# Altium PCB PCB2.PcbDoc (part 1 of 2)
Units mm, origin at the board's own origin, x right, y up, seen from the top; angles counter-clockwise.
Board outline 57.07 x 67 mm, 2 copper layers (Top Layer, Bottom Layer); 55 components, 52 nets, 263 pads, 110 vias.
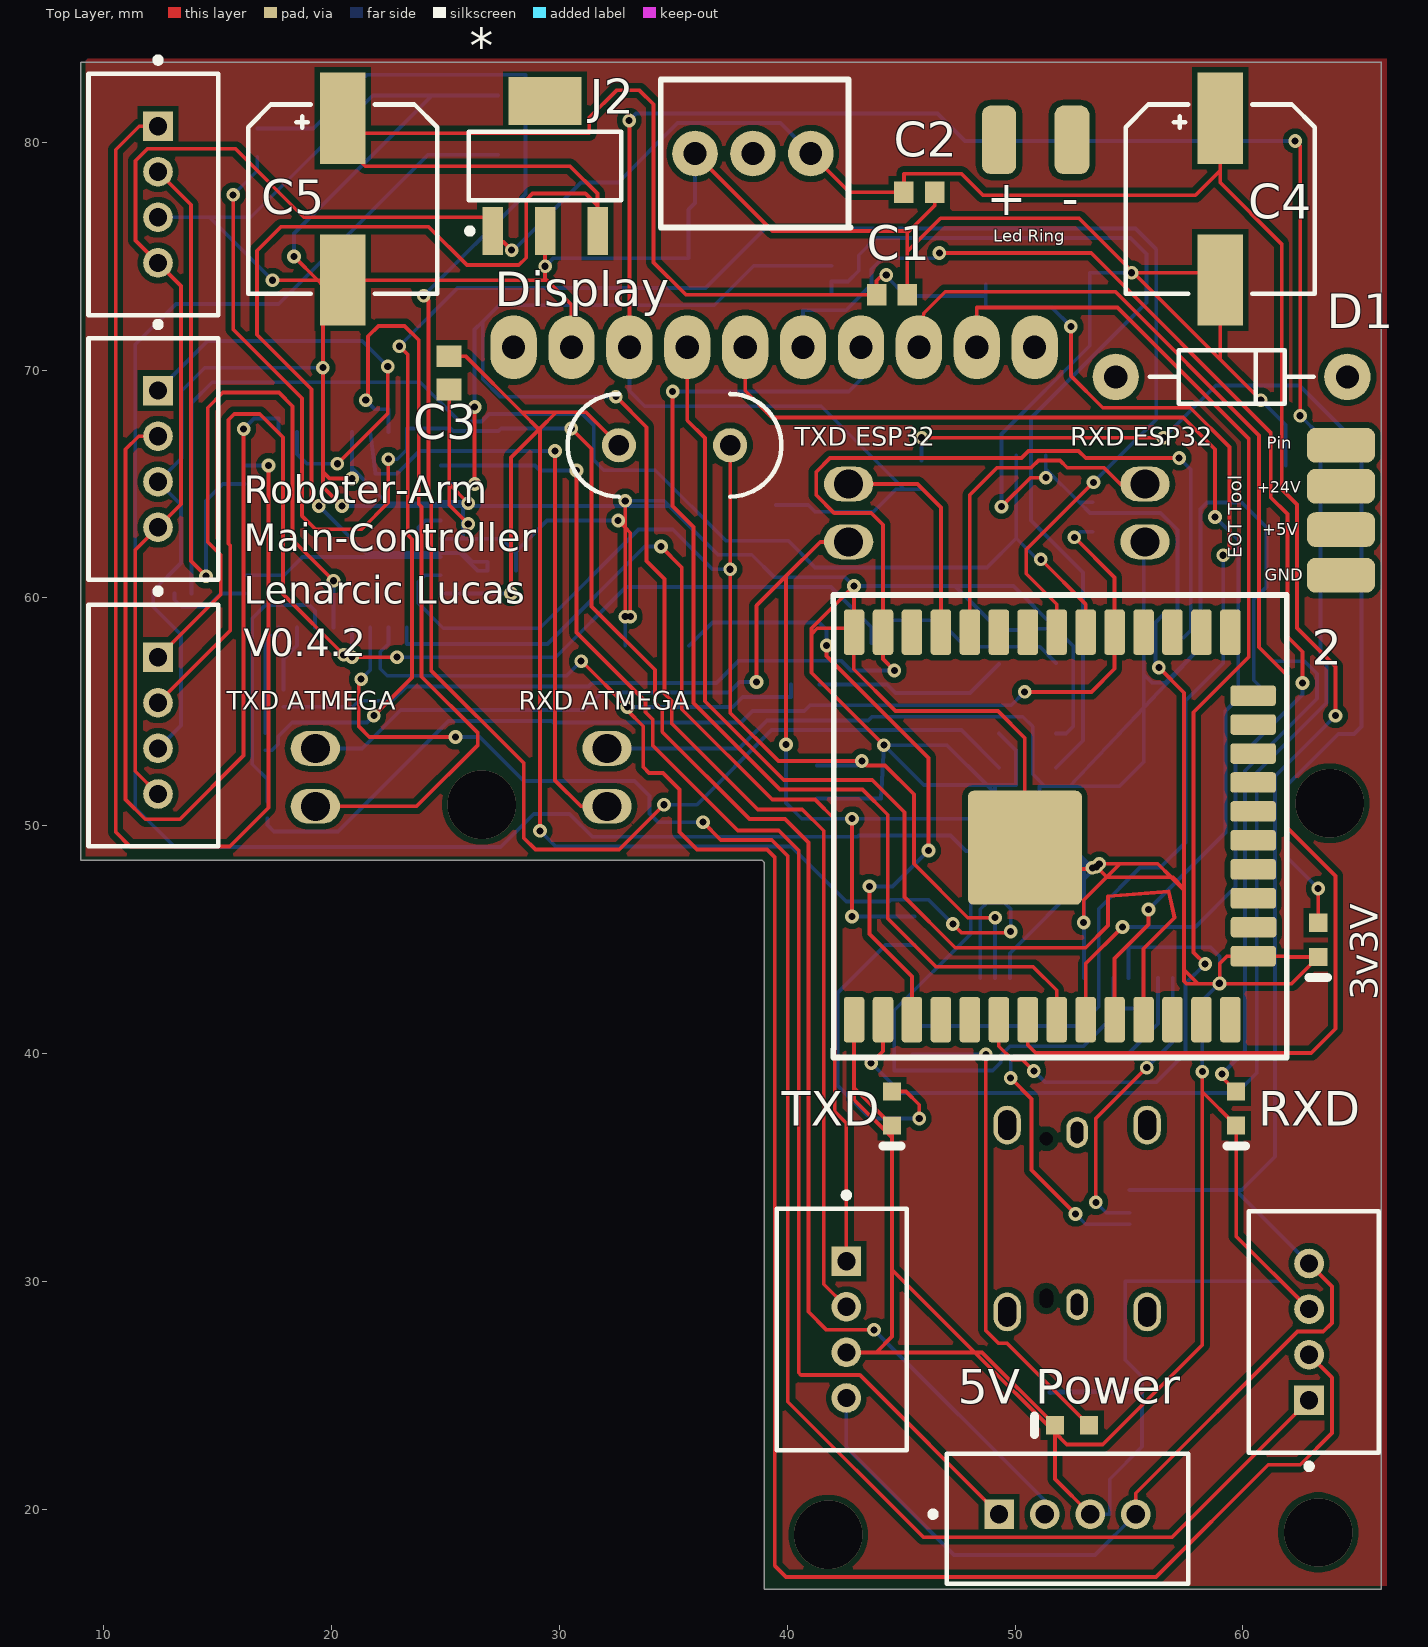
[diagram p0: Top Layer view]
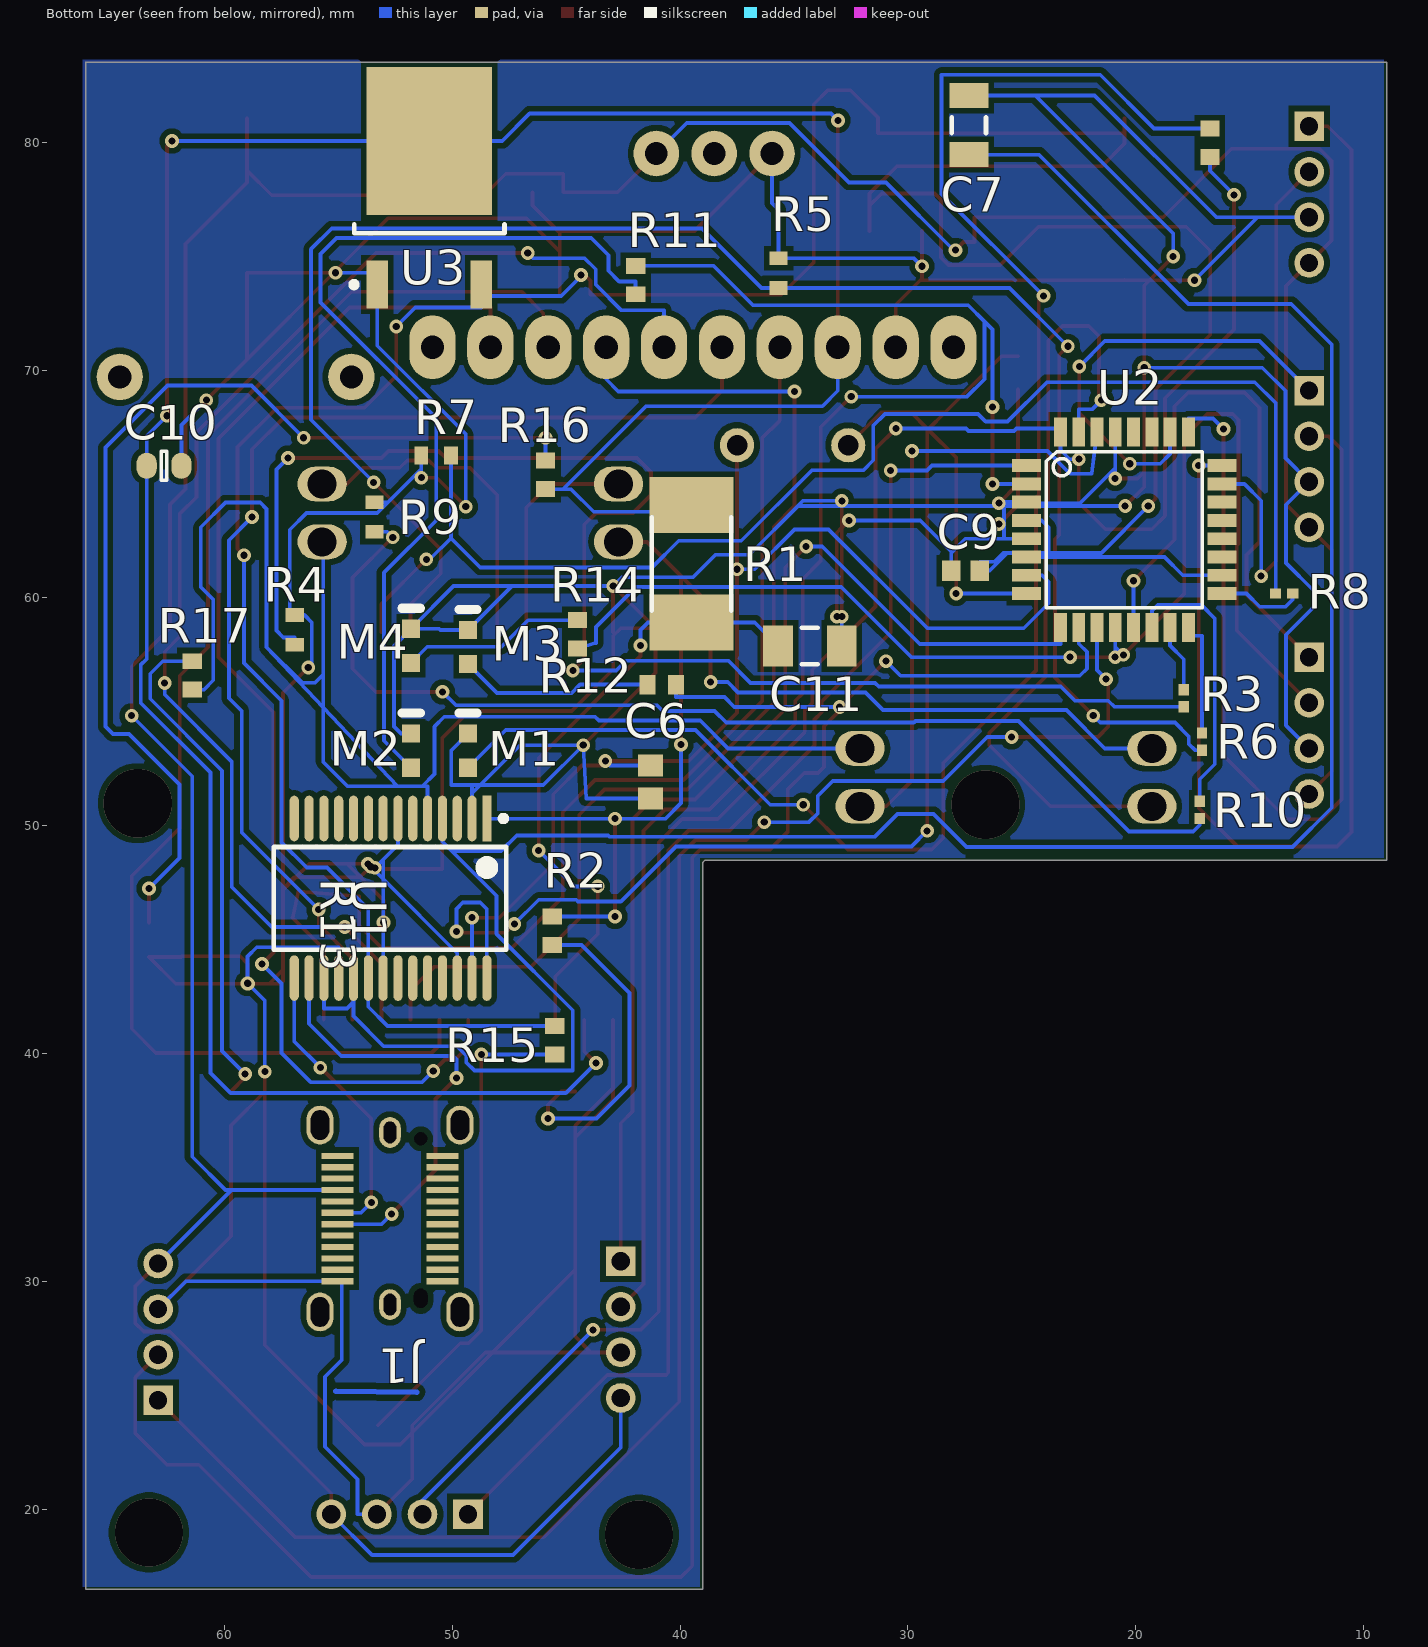
[diagram p1: Bottom Layer view, seen from below]

## Layer stack, top to bottom
Top Solder: solder mask 0.0102, Solder Resist, Dk 3.5
Top Layer: signal copper 0.0356
Dielectric 1: dielectric 0.32, FR-4, Dk 4.8
Bottom Layer: signal copper 0.0356
Bottom Solder: solder mask 0.0102, Solder Resist, Dk 3.5

## Board outline
9,48.5 38.9,48.5 39,48.4 39,16.5 66.075,16.5 66.075,83.5 9,83.5

## Design rules (kind name [scope] priority, off if disabled: settings)
AssemblyTestPointUsage AssemblyTestPointUsage_1 [All] p2:
AssemblyTestpoint AssemblyTestpoint_1 [All] p2: testpointundercomponent=TRUE minsize=1.016 maxsize=2.54 preferedsize=1.524 minholesize=0 maxholesize=1.016 preferedholesize=0.813 testpointgrid=0.025 usegrid=TRUE gridtolerance=0 allowsidetop=TRUE allowsidebottom=TRUE
Clearance [All] p1: gap=0.254 ignorepadtopadclearanceinfootprint=FALSE except(0: Arc-Hole Track-Hole SMDPad-Hole THPad-Hole Via-Hole Fill-Hole Poly-Hole Region-Hole Text-Hole)
Clearance Clearance_1 [All] p2: gap=0.254 ignorepadtopadclearanceinfootprint=FALSE except(0: Arc-Hole Track-Hole SMDPad-Hole THPad-Hole Via-Hole Fill-Hole Poly-Hole Region-Hole Text-Hole)
ComponentClearance ComponentClearance_1 [All] p2: gap=0.254 collisioncheckmode=3 verticalgap=0.254 showdistances=FALSE
DiffPairsRouting DiffPairsRouting_1 [All] p2: maxlimit=0.254 minlimit=0.254 mostfreqgap=0.254 toplayer_minwidth=0.381 toplayer_maxwidth=0.381 toplayer_prefwidth=0.381 bottomlayer_minwidth=0.381 bottomlayer_maxwidth=0.381 bottomlayer_prefwidth=0.381 maxuncoupledlength=12.7
FabricationTestPointUsage FabricationTestPointUsage_1 [All] p2: valid=0 allowmultiple=FALSE
FabricationTestpoint FabricationTestpoint_1 [All] p2: side=3 testpointundercomponent=TRUE minsize=1.016 maxsize=2.54 preferedsize=1.524 minholesize=0 maxholesize=1.016 preferedholesize=0.813 testpointgrid=0.025 allowsidetop=TRUE allowsidebottom=TRUE usegrid=TRUE gridtolerance=0
FanoutControl Fanout_LCC [IsLCC] p1: bgadir=Out bgaviamode=Centered fanoutstyle=Auto fanoutdirection=Alternating viagrid=0.025 // Fanout_LCC (Default Rule)
FanoutControl Fanout_BGA [IsBGA] p2: bgadir=Out bgaviamode=Centered fanoutstyle=Auto fanoutdirection=Alternating viagrid=0.025 // Fanout_BGA (Default Rule)
FanoutControl Fanout_Default [All] p4: bgadir=Out bgaviamode=Centered fanoutstyle=Auto fanoutdirection=Alternating viagrid=0.025 // Fanout_Default (Default Rule)
FanoutControl Fanout_Small [(CompPinCount < 5)] p5: bgadir=Out bgaviamode=Centered fanoutstyle=Auto fanoutdirection=OutThenIn viagrid=0.025 // Fanout_Small (Default Rule)
FanoutControl Fanout_BGA_1 [IsBGA] p6: bgadir=Out bgaviamode=Centered fanoutstyle=Auto fanoutdirection=Alternating viagrid=0.025 // Fanout_BGA (Default Rule)
FanoutControl Fanout_LCC_1 [IsLCC] p7: bgadir=Out bgaviamode=Centered fanoutstyle=Auto fanoutdirection=Alternating viagrid=0.025 // Fanout_LCC (Default Rule)
FanoutControl Fanout_SOIC_1 [IsSOIC] p8: bgadir=Out bgaviamode=Centered fanoutstyle=Auto fanoutdirection=Alternating viagrid=0.025 // Fanout_SOIC (Default Rule)
FanoutControl Fanout_Small_1 [(CompPinCount < 5)] p9: bgadir=Out bgaviamode=Centered fanoutstyle=Auto fanoutdirection=OutThenIn viagrid=0.025 // Fanout_Small (Default Rule)
FanoutControl Fanout_Default_1 [All] p10: bgadir=Out bgaviamode=Centered fanoutstyle=Auto fanoutdirection=Alternating viagrid=0.025 // Fanout_Default (Default Rule)
Height Height_1 [All] p2: minheight=0 maxheight=25.4 prefheight=12.7
HoleSize HoleSize_1 [All] p2: absolutevalues=TRUE maxlimit=2.54 minlimit=0.025 maxpercent=80.000 minpercent=20.000
HoleToHoleClearance HoleToHoleClearance_1 [All] p2: gap=0.254 allowstackedmicrovias=TRUE
LayerPairs LayerPairs_1 [All] p2: enforce=TRUE
MinimumSolderMaskSliver MinimumSolderMaskSliver_1 [All] p2: minsoldermaskwidth=0.254
NetAntennae NetAntennae_1 [All] p2: netantennaetolerance=0
PasteMaskExpansion PasteMaskExpansion_1 [All] p2: expansion=0
PlaneClearance PlaneClearance_1 [All] p2: clearance=0.508
PlaneConnect PlaneConnect_1 [All] p2: planeconnectstyle=Relief reliefexpansion=0.508 reliefentries=4 reliefconductorwidth=0.254 reliefairgap=0.254
PolygonConnect [All] p1: connectstyle=Relief reliefconductorwidth=0.254 reliefentries=4 polygonreliefangle="90 Angle" airgapwidth=0.254
PolygonConnect PolygonConnect_1 [All] p2: connectstyle=Relief reliefconductorwidth=0.254 reliefentries=4 polygonreliefangle="90 Angle" airgapwidth=0.254
RoutingCorners RoutingCorners_1 [All] p2: cornerstyle=45-Degree minsetback=2.54 maxsetback=2.54
RoutingLayers RoutingLayers_1 [All] p2: top layer_v5=TRUE bottom layer_v5=TRUE
RoutingPriority RoutingPriority_1 [All] p2: routingpriority=0
RoutingTopology [All] p1: topology=Daisy_Balanced
RoutingTopology RoutingTopology_1 [All] p2: topology=Shortest
RoutingVias [All] p1: holewidth=0.311 width=0.6 viastyle="Through Hole" minholewidth=0.311 minwidth=0.6 maxholewidth=0.711 maxwidth=1.27
RoutingVias RoutingVias_1 [All] p2: holewidth=0.711 width=1.27 viastyle="Through Hole" minholewidth=0.711 minwidth=1.27 maxholewidth=0.711 maxwidth=1.27
ShortCircuit ShortCircuit_1 [All] p2: allowed=FALSE
SilkToBoardRegionClearance SilkToBoardRegionClearance_1 [All] p2:
SilkToSilkClearance SilkToSilkClearance_1 [All] p2: silktosilkclearance=0.254
SilkToSolderMaskClearance SilkToSolderMaskClearance_1 [IsPad] p2: minsilkscreentomaskgap=0.254 clearancetoexposedcopper=TRUE
SolderMaskExpansion [All] p1: expansion=0.102 istentingtop=FALSE
SolderMaskExpansion SolderMaskExpansion_1 [All] p2: expansion=0.102 istentingtop=FALSE
UnRoutedNet UnRoutedNet_1 [All] p2:
UnpouredPolygon UnpouredPolygon_1 [All] p2:
Width [All] p1: maxlimit=0.254 minlimit=0.144 preferedwidth=0.164 minimp=50.000000 maximp=50.000000 favimp=50.000000
Width Width_1 [All] p2: maxlimit=0.254 minlimit=0.154 preferedwidth=0.204 minimp=50.000000 maximp=50.000000 favimp=50.000000
25 further rules are at their usual default settings.

## Classes and differential pairs
component class Sheet2: * USB-C
component class MainSchematic: 3v3V "3v3V Power" * D6 D7 D8 J1 J2 "RXD ESP32" "TXD ESP32" U1 U2 U3 U4 X1

## Components (designator, comment, footprint, x,y, rotation, side; value= is the part's Value field where it differs from the comment)
2 "Espressif Systems ESP32-WROOM-32U" PCB-s9cahnfxwmssy5lrdql1-1 51.7,50 r90 top (schematic designator U4)
3v3V "HSMD-C190" AVAG-HSMX-C190_V 63.3,45 r270 top (schematic designator "3v3V Power")
"5V Power" "HSMD-C190" AVAG-HSMX-C190_V 52.5,23.7 r180 top
* "Texas Instruments LM7805MPX/NOPB" PCB-4j8pz0fvsyjao2wd9t55-1 29.382,78.95 r90 top
C1 "0,1uF" PCB-ygfjbn9s2h0hdffghsun-1 44.6,73.3 r0 top
C2 "0,1uF" PCB-ygfjbn9s2h0hdffghsun-1 45.8,77.8 r180 top
C3 "30pF" CAPC1608X92X38ML15T08 25.175,69.875 r90 top
C4 "1000uF" PCB-6nlarhmhqnsp8hp5opt1-1 59,77.5 r0 top
C5 "1000uF" PCB-6nlarhmhqnsp8hp5opt1-1 20.5,77.5 r0 top
C6 "30pF" CAPC1608X92X38ML15T08 41.3,51.925 r90 bottom
C7 "100nF" CAPC3216X09L 27.325,80.75 r90 bottom
C9 "100 nf" CAPC1608X87X35LL15T15 27.475,61.2 r180 bottom
C10 "CAP 10uF 0603" CC0603_OV 62.638,65.8 r0 bottom value=10uF
C11 "1nF" CAPC3216X88X50NL20T25 34.3,57.9 r180 bottom
D1 "1N4007" PCBCOMPONENT_1 59.5,69.7 r180 top
Display "Molex 90142-0010" "Molex 90142-0006-Footprint-2" 28,68.206 r0 top (schematic designator *)
J1 "JAE Electronics DX07S024WJ1R350" PCB-c92dq56pmj9hhsl6x7py-1 52.725,32.775 r270 bottom
J2 "INPUT_Power" PCB-6ccby9ci1emhqvhnf7pu-1 38.5,79.5 r0 top
J? "35362-0450" FP-35362-0450-MFG 12.2,77.7 r90 top
J? "35362-0450" FP-35362-0450-MFG 63.1,27.8 r270 top
M1 "HSMD-C190" AVAG-HSMX-C190_V 49.3,53.3 r90 bottom
M2 "HSMD-C190" AVAG-HSMX-C190_V 51.8,53.3 r90 bottom
M3 "HSMD-C190" AVAG-HSMX-C190_V 49.3,57.85 r90 bottom
M4 "HSMD-C190" AVAG-HSMX-C190_V 51.8,57.9 r90 bottom
R1 "12k" RESC6432X07N 39.5,61.5 r90 bottom
R2 "220Ohm" RESC1608X55X30LL15T15 45.6,45.4 r90 bottom
R3 "2,2k" RESC1005X37X25LL05T10 17.9,55.6 r270 bottom
R4 "3,3k" RESC1608X55X25LL10T15 56.9,58.6 r90 bottom
R5 "3,3k" RESC1608X55X25LL10T15 35.675,74.25 r270 bottom
R6 "2,2k" RESC1005X37X25LL05T10 17.1,53.7 r270 bottom
R7 "3,3k" RESC1608X55X25LL10T15 50.7,66.25 r180 bottom
R8 "2,2k" RESC1005X37X25LL05T10 13.5,60.2 r0 bottom
R9 "3,3k" RESC1608X55X25LL10T15 53.4,63.55 r270 bottom
R10 "2,2k" RESC1005X37X25LL05T10 17.2,50.7 r270 bottom
R11 "220Ohm" RESC1608X55X30LL15T15 41.95,73.95 r90 bottom
R12 "220Ohm" RESC1608X55X30LL15T15 40.8,56.2 r180 bottom
R13 "220Ohm" RESC1608X55X30LL15T15 16.75,79.975 r270 bottom
R14 "220Ohm" RESC1608X55X30LL15T15 44.5,58.4 r270 bottom
R15 "220Ohm" RESC1608X55X30LL15T15 45.5,40.6 r90 bottom
R16 "220Ohm" RESC1608X55X30LL15T15 45.9,65.4 r270 bottom
R17 "220Ohm" RESC1608X55X30LL15T15 61.4,56.6 r270 bottom
RXD "HSMD-C190" AVAG-HSMX-C190_V 59.7,37.6 r270 top
"RXD ATMEGA" "RXD ATMEGA" "Amphenol ICC _ FCI 68786-102LF-Footprint-1" 32.1,50.86 r0 top
"RXD ESP32" "RXD ESP32" "Amphenol ICC _ FCI 68786-102LF-Footprint-1" 55.7,62.46 r0 top
TXD "HSMD-C190" AVAG-HSMX-C190_V 44.6,37.6 r270 top
"TXD ATMEGA" "TXD ATMEGA" "Amphenol ICC _ FCI 68786-102LF-Footprint-1" 19.3,50.86 r0 top
"TXD ESP32" "TXD ESP32" "Amphenol ICC _ FCI 68786-102LF-Footprint-1" 42.7,62.46 r0 top
U1 "FTDI FT232RL" PCB-uwrbgvod66r8ixue8rhm-1 52.7,46.8 r270 bottom
U2 "Microchip ATMEGA328P-AU" PCB-pmhtxxix7sripjdh33vl-1 17.688,58.701 r180 bottom
U3 "LD1117DT33TR" TO-252_N 51,78 r90 bottom
X1 "16.000MHZ" PCB-m5wiadh0ra6h79h7klez-1 37.5,66.7 r180 top
? "35362-0450" FP-35362-0450-MFG 12.2,66.1 r90 top
? "35362-0450" FP-35362-0450-MFG 42.4,27.9 r90 top
? "35362-0450" FP-35362-0450-MFG 52.3,19.6 r180 top
? "35362-0450" FP-35362-0450-MFG 12.2,54.4 r90 top

## Footprints (in the part's own frame and the unit in brackets; to place one, negate y for a bottom-side part, rotate by r counter-clockwise, add the part's x,y. Pads: shape width x height; smd on the part's side, far side on the other; paste and mask are expansions set on the pad)
"Amphenol ICC _ FCI 68786-102LF-Footprint-1" [mil]
  oval 85x60 hole 50: 1(0,0) 2(0,100)
  body extent -50,-50 50,150, height 200
AVAG-HSMX-C190_V [mm] "SMD, 2-Leads, Body 1.6x0.8mm, Height 0.9mm"
  rect 0.8x0.8 smd: 1(-0.75,0) 2(0.75,0)
  silkscreen extent 1.65,-0.4 1.65,0.4, body extent -0.8,-0.4 0.8,0.4, height 0.9
CAPC1608X87X35LL15T15 [mm] "CAPC1608X87X35LL15T15"
  rect 0.8x0.9 smd: 1(-0.625,0) 2(0.625,0)
  body extent -0.87,-0.48 0.87,0.48, height 0.87
CAPC1608X92X38ML15T08 [mm] "CAPC1608X92X38ML15T08"
  rect 0.95x1.1 smd: 1(-0.725,0) 2(0.725,0)
  body extent -0.87,-0.48 0.87,0.47, height 0.92
CAPC3216X09L [mm] "Chip Capacitor, 2-Leads, Body 3,20x1,60mm, IPC High Density"
  rect 1.1x1.7 smd: 1(-1.3,0) 2(1.3,0)
  silkscreen extent -0.35,-0.75 0.35,0.75, body extent -1.7,-0.9 1.7,0.9, height 0.95
CAPC3216X88X50NL20T25 [mm] "CAPC3216X88X50NL20T25"
  rect 1.3x1.8 smd: 1(-1.4,0) 2(1.4,0)
  silkscreen extent -0.35,-0.8 0.35,0.8, body extent -1.7,-0.9 1.7,0.9, height 0.88
CC0603_OV [mil] "CC0603_OV"
  oval 35x45 smd: 1(-30,0) 2(30,0)
  silkscreen extent -5,-25 5,25, body extent -31,-16 31,16, height 35
FP-35362-0450-MFG [mm]
  rect 1.3x1.3 hole 0.8 paste-1000 mask+0: 1(3,-0.2)
  round 1.3 hole 0.8 paste-1000 mask+0: 2(1,-0.2) 3(-1,-0.2) 4(-3,-0.2)
  silkscreen extent -5.3,-2.85 6.02,2.85, body extent -5.4,-2.95 5.4,2.95, height 0.25
"Molex 90142-0006-Footprint-2" [mil]
  oval 80x110 hole 40: 0(0,110) 1(100,110) 2(200,110) 3(300,110) 4(400,110) 5(500,110) 6(600,110) 7(700,110) 8(800,110) 9(900,110)
PCB-4j8pz0fvsyjao2wd9t55-1 [mm] "STM-SOT223_L"
  rect 2.1x0.9 smd: 1(-2.85,2.3) 2(-2.85,0) 3(-2.85,-2.3)
  rect 2.1x3.2 smd: 4(2.85,0)
  silkscreen extent -2.97,-3.35 1.5,3.42, body extent -1.85,-3.35 1.85,3.35, height 1.8
PCB-6ccby9ci1emhqvhnf7pu-1 [mm]
  round 2 hole 1: 1(-2.54,0) 2(0,0) 3(2.54,0)
  silkscreen extent -4.04,-3.25 4.29,3.25, body extent -4.04,-3.17 4.04,3.32, height 10
PCB-6nlarhmhqnsp8hp5opt1-1 [mm] "SMD, 2-Leads, Body 8.3x8.3mm, Height 10.5mm"
  rect 2x4 smd: 1(0,3.55) 2(0,-3.55)
  silkscreen extent -4.15,-4.15 4.15,4.15, body extent -4.15,-4.97 4.15,4.95, height 10.5
PCB-c92dq56pmj9hhsl6x7py-1 [mm]
  oval 1.7x1.2 hole 0.8 slot 1.3 at 0 deg: 0(-4.1,-3.07) 0(-4.1,3.07) 0(4.1,-3.07) 0(4.1,3.07)
  oval 1.35x0.95 hole 0.55 slot 0.95 at 0 deg: 0(-3.775,0) 0(3.775,0)
  rect 0.27x1.4 smd: A1(-2.75,2.3) A2(-2.25,2.3) A3(-1.75,2.3) A4(-1.25,2.3) A5(-0.75,2.3) A6(-0.25,2.3) A7(0.25,2.3) A8(0.75,2.3) A9(1.25,2.3) A10(1.75,2.3) A11(2.25,2.3) A12(2.75,2.3) B1(2.75,-2.3) B2(2.25,-2.3) B3(1.75,-2.3) B4(1.25,-2.3) B5(0.75,-2.3) B6(0.25,-2.3) B7(-0.25,-2.3) B8(-0.75,-2.3) B9(-1.25,-2.3) B10(-1.75,-2.3) B11(-2.25,-2.3) B12(-2.75,-2.3)
  round 0 hole 0.6 unplated: ""(-3.5,1.35)
  round 0 hole 0.6 slot 0.85 at 0 deg unplated: ""(3.5,1.35)
PCB-m5wiadh0ra6h79h7klez-1 [mm]
  round 1.5 hole 0.9: 1(0,0) 2(4.88,0)
  silkscreen extent -2.25,-2.25 7.13,2.25
PCB-pmhtxxix7sripjdh33vl-1 [mil] "TQFP32-08"
  rect 50x22 smd: 1(-280,280) 2(-280,248) 3(-280,217) 4(-280,185) 5(-280,153.25) 6(-280,121.76) 7(-280,90.26) 8(-280,58.76) 17(58,58.76) 18(58,90.26) 19(58,121.76) 20(58,153.25) 21(58,185) 22(58,217) 23(58,248) 24(58,280)
  rect 22x50 smd: 9(-221.24,0) 10(-189.74,0) 11(-158.24,0) 12(-126.75,0) 13(-95,0) 14(-63,0) 15(-32,0) 16(0,0) 25(0,338) 26(-32,338) 27(-63,338) 28(-95,338) 29(-126.75,338) 30(-158.24,338) 31(-189.74,338) 32(-221.24,338)
  silkscreen extent -246,34 24,304, body extent -288,-8 66,346, height 40
PCB-s9cahnfxwmssy5lrdql1-1 [mm]
  rrect30% 2x0.9 smd: 1(-8.5,8.763) 2(-8.5,7.493) 3(-8.5,6.223) 4(-8.5,4.953) 5(-8.5,3.683) 6(-8.5,2.413) 7(-8.5,1.143) 8(-8.5,-0.127) 9(-8.5,-1.397) 10(-8.5,-2.667) 11(-8.5,-3.937) 12(-8.5,-5.207) 13(-8.5,-6.477) 14(-8.5,-7.747) 25(8.5,-7.747) 26(8.5,-6.477) 27(8.5,-5.207) 28(8.5,-3.937) 29(8.5,-2.667) 30(8.5,-1.397) 31(8.5,-0.127) 32(8.5,1.143) 33(8.5,2.413) 34(8.5,3.683) 35(8.5,4.953) 36(8.5,6.223) 37(8.5,7.493) 38(8.5,8.763)
  rrect30% 0.9x2 smd: 15(-5.715,-8.747) 16(-4.445,-8.763) 17(-3.175,-8.747) 18(-1.905,-8.747) 19(-0.635,-8.747) 20(0.635,-8.747) 21(1.905,-8.747) 22(3.175,-8.747) 23(4.445,-8.747) 24(5.715,-8.747)
  rrect10% 5x5 smd: 39(-0.957,1.27)
  silkscreen extent -10.16,-10.22 10.13,9.68, body extent -9.02,-9.27 9.05,16.27, height 3.04
PCB-uwrbgvod66r8ixue8rhm-1 [mm] "SOP, 28-Leads, Body 10.2x5.3mm, Pitch 0.65mm, IPC High Density"
  rect 2x0.4 smd: 1(-3.525,4.225)
  oval 2x0.4 smd: 2(-3.525,3.575) 3(-3.525,2.925) 4(-3.525,2.275) 5(-3.525,1.625) 6(-3.525,0.975) 7(-3.525,0.325) 8(-3.525,-0.325) 9(-3.525,-0.975) 10(-3.525,-1.625) 11(-3.525,-2.275) 12(-3.525,-2.925) 13(-3.525,-3.575) 14(-3.525,-4.225) 16(3.475,-3.575) 17(3.475,-2.925) 18(3.475,-2.275) 19(3.475,-1.625) 20(3.475,-0.975) 21(3.475,-0.325) 22(3.475,-4.225) 22(3.475,0.325) 23(3.475,0.975) 24(3.475,1.625) 25(3.475,2.275) 26(3.475,2.925) 27(3.475,3.575) 28(3.475,4.225)
  silkscreen extent -3.65,-5.13 2.22,5.07, body extent -2.68,-5.13 2.62,5.07, height 2.01
PCB-ygfjbn9s2h0hdffghsun-1 [mm] "CAPC1608X90X35NL10T15"
  rect 0.85x0.95 smd: 1(-0.675,0) 2(0.675,0)
  body extent -0.85,-0.45 0.85,0.45, height 0.9
PCBCOMPONENT_1 [mil] "AXIAL, 2-Leads, Diameter 2.35mm"
  round 80 hole 40: 1(200,0) 2(-200,0)
  silkscreen extent -142,-46 142,46, body extent -217,-52 217,55, height 114
RESC1005X37X25LL05T10 [mm] "RESC1005X37X25LL05T10"
  rect 0.5x0.45 smd: 1(-0.375,0) 2(0.375,0)
  body extent -0.53,-0.27 0.53,0.28, height 0.37
RESC1608X55X25LL10T15 [mm] "RESC1608X55X25LL10T15"
  rect 0.6x0.8 smd: 1(-0.65,0) 2(0.65,0)
  body extent -0.85,-0.45 0.85,0.45, height 0.55
RESC1608X55X30LL15T15 [mm] "RESC1608X55X30LL15T15"
  rect 0.7x0.85 smd: 1(-0.625,0) 2(0.625,0)
  body extent -0.87,-0.48 0.87,0.48, height 0.55
RESC6432X07N [mm] "Chip Resistor, 2-Leads, Body 6.35x3.20mm, IPC Medium Density"
  rect 2.45x3.7 smd: 1(-2.575,0) 2(2.575,0)
  silkscreen extent -2.05,-1.75 2.05,1.75, body extent -3.23,-1.68 3.22,1.67, height 0.65
TO-252_N [mm] "D-PAK, 4-Leads, Body 6.1x6.5mm, Pitch 2.28mm, Lead Span 9.7mm, IPC Medium Density"
  rect 2.1x0.95 smd: 1(-4.25,2.28) 3(-4.25,-2.28)
  rect 6.5x5.5 smd: 4(2.05,0)
  silkscreen extent -4.37,-3.3 -1.6,3.43, body extent -2,-3.3 4.2,3.3, height 2.4

## Part data
2: library part CMP-ba1676706f1765d1-28, "WiFi Modules (802.11) SMD Module, ESP32-D0WDQ6, 32Mbits SPI flash, UART Mode"
3v3V "5V Power" RXD TXD ? ? ? ?: library part CMP-90265921f4414fe1-1, "598 Series Blue 2 x 1.25 x 0.7 mm 140° Water Clear 140 mcd 3.2 V SMT LED", Case/Package=0805, Case/Package (SI)=2012, Color=Blue, Forward Voltage="3.20 V", Manufacturer Part Number=598-8191-107F, Lead-Free Status="Lead Free", Lens Type=Non-Diffused, Luminous Intensity="140 mcd", Mounting Style="Surface Mount", Number of Pins=2, Octopart URL=http://octopart.com/598-8191-107f-dialight-868609, OctopartID=90265921f4414fe1, Packaging=Reel, RoHS=Compliant, Size-Height="700 µm", Size-Length="2.00 mm", Size-Width="1.25 mm", Viewing Angle="140 °", Wavelength="475 nm, 473 nm"
*: library part CMP-00afcdd7e6a1df68-3, "1.5-A, Wide VIN Fixed Voltage Regulators 4-SOT-223 0 to 0", Case/Package=SOT-223, Dropout Voltage="2.00 V", Manufacturer Part Number=LM7805MPX/NOPB, Operating Temperature="0.00 °C to 125 °C", Output Capacitor Type=Ceramic, Quiescent Current="6.00 mA", Lead-Free Status="Contains Lead", Lifecycle Status=Active, Number of Pins=4, Number of Regulated Outputs=1, Octopart URL=https://octopart.com/lm7805mpx%2Fnopb-texas+instruments-74629992, OctopartID=00afcdd7e6a1df68, RoHS=Compliant
C1 C2: library part CMP-230febb915d7fcc8-1, "0603 0.1 uF 35 V ±10 % Tolerance X7R Surface Mount Multilayer Ceramic Capacitor", Capacitance="100 nF", Capacitance Tolerance=±10%, Case/Package=0603, Manufacturer Part Number=GMK107B7104KAHT, Voltage Rating (DC)="35.0 V", Halogen Free Status="Halogen Free", Lead-Free Status="Lead Free", Lifecycle Status=Active, Mounting Style="Surface Mount", Octopart URL=https://octopart.com/gmk107b7104kaht-taiyo+yuden-29103038, OctopartID=230febb915d7fcc8, Packaging="Cut Tape (CT)", RoHS=Compliant
C3 C6: library part CMP-3554665-2, "Multilayer Ceramic Capacitors MLCC - SMD/SMT 0603 30pF 250V C0G 5% HI FREQ", Capacitance="3e-11 F", Capacitance Tolerance=±5%, Dielectric Characteristic=C0G/NP0, Manufacturer Part Number=VJ0603D300JXPAJ, Voltage Rating (DC)="250.0 V", Lead-Free Status="Lead Free", Octopart URL=https://octopart.com/vj0603d300jxpaj-vishay-45210262, OctopartID=a54f6ef45abf7a88, Packaging="Cut Tape (CT)", RoHS=Compliant
C4 C5: library part CMP-ee612768d29831a6-2, "1000uF 6.3 V Aluminium Electrolytic Capacitor; WT Series 1000h 8 (Dia.) x 10mm", Capacitance="1.00 mF", Capacitance Tolerance=±20%, Dielectric Material="Aluminum Electrolytic", Manufacturer Part Number=UWT0J102MNL1GS, Operating Temperature="105 °C (max)", Voltage Rating (DC)="6.30 V", Lead-Free Status="Lead Free", Mounting Style="Surface Mount", Number of Pins=2, Octopart URL=https://octopart.com/uwt0j102mnl1gs-nichicon-203167, OctopartID=ee612768d29831a6, Packaging="Cut Tape (CT), Tape & Reel (TR)", RoHS=Compliant, Size-Diameter="8.00 mm", Size-Height="10.0 mm", Size-Length="10.0 mm"
C7: library part CMP-7716bc466958a8d1-1, "1206 100000 pF 50V ±10% Tolerance X7R Surface Mount Multilayer Ceramic Capacitor", Capacitance="100 nF", Capacitance Tolerance=±10%, Case/Package=1206, Case/Package (SI)=3216, Dielectric Characteristic=X7R, Insulation Resistance="100 GΩ", Manufacturer Part Number=CC1206KRX7R9BB104, Voltage Rating (DC)="50.0 V", Halogen Free Status="Halogen Free", Lead-Free Status="Lead Free", Mounting Style="Surface Mount", Number of Pins=2, Octopart URL=http://octopart.com/cc1206krx7r9bb104-yageo-39467816, OctopartID=7716bc466958a8d1, Packaging="Cut Tape (CT), Tape & Reel (TR)", REACH SVHC Compliance="No SVHC", RoHS=Compliant, Size-Height="1.14 mm", Size-Length="3.20 mm", Size-Width="1.60 mm"
C9: library part CMP-1af8d38ac64bc53f-10, "Ceramic capacitor SMD-0603 100nF /50V X7R# K +-10%, Samsung, RoHS", Capacitance="100 nF", Capacitance Tolerance=±10%, Case/Package=0603, Dielectric Characteristic=X7R, Manufacturer Part Number=CL10B104KB8NNNC, Voltage Rating (DC)="50.0 V", Lead-Free Status="Lead Free", Mounting Style="Surface Mount", Octopart URL=https://octopart.com/cl10b104kb8nnnc-samsung-7928277, OctopartID=1af8d38ac64bc53f, RoHS=Compliant
C10: library part CMP-121611-5, "C Series 0603 10 uF 25 V ±10 % Tolerance X5R Multilayer Ceramic Capacitor", Manufacturer=Murata, Package=0603, Part Number=GRM188R61E106KA73J, Tolerance=10%, Voltage/Wattage=25V, Ex Price=0.36, Ex Supplier=https://www.mouser.vn/ProductDetail/Murata-Electronics/GRM188R61E106KA73J?qs=sGAEpiMZZMukHu%252BjC5l7YUSokBdqpA2iyRK88YQudCM%3D, OctopartID=a02668a768b37fe1, VN Price=850, VN Supplier=https://www.thegioiic.com/products/tu-gom-0603-10uf-25v
C11: library part CMP-8261919-2, "Multilayer Ceramic Capacitors MLCC - SMD/SMT 50volts 1000pF 10% X7R", Capacitance="1e-09 F", Capacitance Tolerance=±10%, Case/Package=1206, Case/Package (SI)=3216, Dielectric Characteristic=X7R, Dielectric Material=Ceramic, Manufacturer Part Number=C1206C102K5RAC, Voltage Rating (DC)="50.0 V", Lead-Free Status=R, Mounting Style="Surface Mount", Number of Pins=2, Octopart URL=https://octopart.com/c1206c102k5rac-kemet-967170, OctopartID=80a249a667c65f65, RoHS=Compliant
D1: library part CMP-9114309-20, "1N4007 Series 1000 V 1 A Axial Lead Standard Recovery Rectifier - CASE 59-10", Breakdown Voltage="1.00 kV (max)", Case/Package=DO-204, Current Rating="1.00 A", Forward Voltage="1.10 V", Manufacturer Part Number=1N4007G, Operating Temperature="-65.0 °C to 175 °C", Output Current="1.00 A (max)", Voltage Rating (DC)="1.00 kV", Halogen Free Status="Halogen Free", Lead-Free Status="Lead Free", Lifecycle Status=Active, Mounting Style=Axial, Number of Pins=2, Octopart URL=https://octopart.com/1n4007g-on+semiconductor-6031, OctopartID=ffb836b2cd51207f, Packaging=Bulk, Polarity=Standard, REACH SVHC Compliance="No SVHC", RoHS=Compliant
Display: library part CMP-a2626b6ccecb7da5-2, "2.54mm Pitch C-Grid III Crimp Housing Dual Row, 8 Circuits, Black", Color=Black, Contact Resistance="20.0 mΩ", Current Rating="3.00 A", Flammability Rating="UL 94 V-0", Insulation Resistance="5.00 GΩ", Manufacturer Part Number=90142-0008, Operating Temperature="105 °C (max)", Voltage Rating (AC)="350 V", Gender=Female, Glow Wire Compliant=Non-Compliant, Halogen Free Status="Not Reviewed", Housing Color=Black, Lead-Free Status="Lead Free", Lifecycle Status=Active, Mounting Style=PCB, Number of Contacts=8, Number of Positions=8, Number of Rows=2, Octopart URL=https://octopart.com/90142-0008-molex-281039, OctopartID=a2626b6ccecb7da5, Packaging=Bag, Pin Pitch="2.54 mm", REACH SVHC Compliance="No SVHC", RoHS=Compliant, Size-Height="7.72 mm", Size-Length="10.3 mm", Size-Width="15.2 mm"
J1: library part CMP-100bdd7e1ee2cfcc-1, "Vertical Mount Type C receptacle; 12mm Height", Case/Package="USB TYPE-C Vertical Mount", Manufacturer="JAE Electronics", Manufacturer Part Number=DX07S024WJ1R350, Supplier Part Number=670-2949-2-ND, Octopart URL=https://octopart.com/dx07s024wj1r350-jae+electronics-75443087, OctopartID=100bdd7e1ee2cfcc, Supplier=Digi-Key
J2: library part CMP-751491-6, "Conn Terminal Block 3 POS 2.54mm Solder ST Thru-Hole 10A/Contact", Color=Green, Flammability Rating="UL 94 V-0", Manufacturer Part Number=282834-3, Operating Temperature="-40.0 °C to 110 °C", Contact Material=Brass, Contact Plating=Tin, ELV Compliant=Compliant, Housing Color=Green, Housing Material="Nylon 6/6", Lead-Free Status="Lead Free", Lifecycle Status=Active, Mounting Style="Through Hole, Screw", Number of Contacts=3, Number of Positions=3, Number of Rows=1, Octopart URL=https://octopart.com/282834-3-te+connectivity-39539741, OctopartID=2bf4e0a55a8ff433, Orientation="Right Angle", Packaging=Bulk, Pin Pitch="2.54 mm", REACH SVHC Compliance="No SVHC", RoHS=Compliant, Size-Height="10.0 mm", Size-Length="8.08 mm", Size-Width="6.50 mm", Wire Gauge="16.0 AWG to 30.0 AWG"
J? J?: library part CMP-04776-000310-1, "CONN HEADER VERT 4POS 2MM", Color=White, Flammability Rating="UL94 V-0", Housing Color=Natural, Max Operating Temperature=105°C, Min Operating Temperature=-40°C, Voltage Rating=125V, Connector Type=Header, Contact Finish - Mating=TIN, Contact Material=Brass, Contact Mating Length=0.145inch, Contact Plating=Tin, Contact Post Length=0.13inch, Contact Shape=Square, Contact Type="Male Pin", Fastening Type=Ramp, Gender=Male, Glow Wire Compliant=Non-compliant, Halogen Free="Low Halogen", Insulation Color=Natural, Insulation Height=0.335inch, Insulation Material=Nylon, Lead Free="Lead Free", Mated Stacking Heights=8.5mm, Mount="Through Hole", Number of Circuits=4, Number of Positions=4, Number of Rows=1, Orientation=Vertical, Packaging=Bulk, RoHS Compliant=Yes, Termination="Kinked Pin"
M1 M2 M3 M4: library part CMP-1744-00006-1, "LED Uni-Color Orange, 52 mW, 20 mA, -40 to 85 degC, 2-Pin SMD, RoHS, Tape and Reel", Max Operating Temperature=225degC, Min Operating Temperature=-40degC, Package Quantity=100, ComponentLink1Description="Manufacturer URL", ComponentLink1URL=http://www.avagotech.com/, ComponentLink2Description=Datasheet, ComponentLink2URL=http://docs.avagotech.com/docs/AV02-0551EN, ComponentLink3Description="Package Specification", ComponentLink3URL=http://www.fairchildsemi.com/dwg/MA/MA03D.pdf, DatasheetVersion=Mar-12, PackageDescription="2-Pin Surface Mount Device, Body 1.6 x 0.8 mm, Height 0.9 mm", PackageReference=HSMX-C190, RoHSCompliant=True
R1: library part CMP-ad5c66e3363d729b-1, "Res Thick Film 2512 12K Ohm 1% 2W ±100ppm/C Pad SMD Automotive T/R", Manufacturer Part Number=352112KFT, Power Rating="2.00 W", Resistance="12.0 kΩ", Resistance Tolerance=±1%, Temperature Coefficient="-100 ppm/°C to 100 ppm/°C", Voltage Rating (DC)="250 V", ELV Compliant=Compliant, Lead-Free Status="Lead Free", Lifecycle Status="Not Listed by Manufacturer", Mounting Style="Surface Mount", Octopart URL=https://octopart.com/352112kft-te+connectivity-45465095, OctopartID=ad5c66e3363d729b, Packaging="Tape & Reel (TR)", REACH SVHC Compliance="No SVHC", RoHS=Compliant
R2 R11 R12 R13 R14 R15 R16 R17: library part CMP-3654704-2, "Thick Film Resistors 0603 220ohms 5% Tol", Case/Package=0603, Manufacturer Part Number=ERJ-3GEYJ221V, Power Rating="0.1 W", Resistance="220.0 Ω", Resistance Tolerance=±5%, Voltage Rating (DC)="75.0 V", Lead-Free Status="Lead Free", Lifecycle Status="Not Listed by Manufacturer", Mounting Style="Surface Mount", Octopart URL=https://octopart.com/erj-3geyj221v-panasonic-55422036, OctopartID=68a3a2e4e191b764, Packaging="Cut Tape (CT)", REACH SVHC Compliance="No SVHC", RoHS=Compliant, Size-Height="0.00045 m", Size-Length="0.0016 m", Size-Width="0.0008 m"
R3 R6 R8 R10: library part CMP-7833842-2, "Thick Film Resistors - SMD 1/16W 3.3K ohm 1%", Case/Package=0402, Manufacturer Part Number=AC0402FR-073K3L, Resistance="3300.0 Ω", Resistance Tolerance=±1%, Lead-Free Status="Lead Free", Mounting Style="Surface Mount", Octopart URL=https://octopart.com/ac0402fr-073k3l-yageo-24618178, OctopartID=ace0649d2d447327, RoHS=Compliant
R4 R5 R7 R9: library part CMP-1872096-2, "RES SMD 2.2K OHM 1% 1/10W 0603", Case/Package=0603, Manufacturer Part Number=AC0603FR-072K2L, Resistance="2200.0 Ω", Resistance Tolerance=±1%, Lead-Free Status="Lead Free", Mounting Style="Surface Mount", Octopart URL=https://octopart.com/ac0603fr-072k2l-yageo-21711100, OctopartID=1dc9d5887053c20e, RoHS=Compliant
"RXD ATMEGA" "RXD ESP32" "TXD ATMEGA" "TXD ESP32": library part CMP-3e4bf223796ce18c-1, "connector; 1x2 low profile jumper assembly; gold plated cont; polyester body", Color=White, Manufacturer Part Number=68786-102LF, Contact Plating=Gold, Lead-Free Status="Lead Free", Octopart URL=https://octopart.com/68786-102lf-amphenol+icc+%2F+fci-90333761, OctopartID=3e4bf223796ce18c, RoHS=Compliant
U1: library part CMP-1159378-22, "Usb Interface Ics Usb to Serial Uart 28 Pin SSOP", Manufacturer Part Number=FT232RL, Operating Temperature="-40.0 °C (min)", Supply Current="15.0 mA", Supply Voltage (DC)="1.80 V (min), 5.25 V (max)", Bandwidth="48.0 MHz", Data Rate="3.00 Mbps", Lead-Free Status="Lead Free", Mounting Style="Surface Mount", Number of Pins=28, Octopart URL=https://octopart.com/ft232rl-ftdi-2151617, OctopartID=bcc675ec4d616301, Packaging=Tube, REACH SVHC Compliance="No SVHC", RoHS=Compliant
U2: library part CMP-973185-51, "ATmega Series 32 kB Flash 2 kB SRAM 20 MHz 8-Bit Microcontroller - TQFP-32"
U3: library part CMP-1248216-2, "Fixed Low Drop Positive Voltage Regulator, 3.3V, 3-Pin DPAK, Tape and Reel", Dropout Voltage="1.1 V", Output Current="0.8 A", Lead-Free Status="Lead Free", Lifecycle Status=Active, Manufacturer Part Number=LD1117DT33TR, Mounting Style="Surface Mount", Number of Outputs=1, Number of Pins=3, Octopart URL=https://octopart.com/ld1117dt33tr-stmicroelectronics-526721, OctopartID=07f8cefa2b1fd83f, Packaging="Cut Tape (CT)", REACH SVHC Compliance="No SVHC", RoHS=Compliant
X1: library part CMP-fc9f355d6cd42358-1, "CRYSTAL, THT, 16.000MHZ; Frequency: 16MHz; Frequency Tolerance: ± 30ppm; Load Capacitance: 18pF; Frequency Tolerance:...", Frequency="16.0 MHz", Load Capacitance="18.0 pF", Manufacturer Part Number="16.000MHZ HC49/4H/30/50/40/18PF/ATF", Operating Temperature="-40.0 °C to 85.0 °C", Number of Pins=2, Octopart URL=https://octopart.com/16.000mhz+hc49%2F4h%2F30%2F50%2F40%2F18pf%2Fatf-euroquartz-13153581, OctopartID=fc9f355d6cd42358, REACH SVHC Compliance="No SVHC", RoHS=Compliant

## Free pads (board coordinates)
  rrect50% 1.5x3 smd: 33(49.3,80.1)
  rrect50% 1.524x3 smd: 34(52.5,80.1)
  rrect50% 3x1.524 smd: 35(64.3,61) 36(64.3,63) 37(64.3,64.9) 40(64.3,66.7)

## Via types
v1: diameter 0.6, hole 0.311, Top Layer to Bottom Layer, 106 vias
v2: diameter 3, hole 3, Top Layer to Bottom Layer, 4 vias

## Nets (pads, with @x,y where several pads share a name; then routed paths per layer and width w, separated by ;. In a path a pad name is that pad's centre, name@x,y a point inside that pad or via, vN(x,y) a via of type N, cw(c..) or ccw(c..) an arc to the next point about the centre after c; other vN are vias at no path point)
BLK: 2.6 Display.8 | length 55.1
  Top Layer w0.164: Display.8 48.32,72.746 54.501,72.746 60.249,66.998 60.249,57.404 57.835,54.99 57.835,44.45 v1(58.343,43.942) ; 2.6 49.287,40.33 49.866,39.751 50.317,39.751 v1(50.825,39.243)
  Bottom Layer w0.164: v1(50.825,39.243) 51.31,38.758 56.207,38.758 57.483,40.034 57.483,43.082 v1(58.343,43.942)
"Communication PIN": 2.25
Con2: *.3 C1.1 C5.1 C9.2 R15.2 U1.20 U2.4 U2.6 U2.18 U3.3 | length 157.9
  Top Layer w0.164: v1(19.456,64.033) 19.137,64.353 19.137,69.154 16.739,71.552 16.739,75.235 17.79,76.286 24.273,76.286 25.952,74.607 28.227,74.607 28.551,74.93 28.551,77.47 28.83,77.749 31.149,77.749 31.682,77.216 ; C5.1 C5.1@20.5,80.391 ; *.3 31.682,77.216 ; v1(44.348,74.168) 44.179,74.168 43.925,73.914 C1.1 35.56,73.3 34.138,74.722 34.138,81.661 33.528,82.271 32.512,82.271 31.318,81.077 31.318,80.391 C5.1@20.5,80.391 ; v1(52.451,71.907) 52.451,69.745 53.848,68.348 57.687,68.348 59.413,66.622 59.413,62.156 v1(59.131,61.874) ; C5.1@20.5,80.391 20.5,79.934 21.491,78.943 30.48,78.943 31.682,77.741 31.682,77.216
  Bottom Layer w0.164: U2.18 17.941,60.994 18.741,61.794 24.13,61.794 ; v1(19.456,64.033) 21.514,61.976 23.825,61.976 ; U2.6 24.13,61.794 ; U2.4 24.13,63.4 23.825,63.095 23.825,62.098 ; v1(44.348,74.168) 44.348,74.117 45.212,73.254 U3.3@48.72,73.254 ; R15.2 52.832,41.225 53.675,42.068 U1.20 53.675,46.36 55.485,48.17 56.374,48.17 57.48,49.276 57.48,55.49 59.131,57.141 v1(59.131,61.874) ; U3.3 U3.3@48.72,73.254 ; v1(52.451,71.907) 51.613,72.746 48.72,72.746 U3.3@48.72,73.254 ; 23.825,61.976 23.948,61.976 ; 23.825,61.976 23.825,62.098 ; 23.825,62.098 23.948,61.976 ; 23.948,61.976 24.8,61.976 25.64,61.976 ; 23.948,61.976 24.13,61.794 ; 25.64,61.976 25.806,61.976 26.187,61.595 26.85,61.595 C9.2 26.416,61.2 25.64,61.976
Con3: 2.2 C10.2 Display.2 R1.2 R16.2 U3.4 | length 125.2
  Top Layer w0.164: v1(33.071,80.95) 33.08,80.941 Display.2 ; v1(43.688,39.599) 44.207,40.118 2.2 ; v1(62.292,80.05) 62.509,79.832 v1(62.509,67.996)
  Bottom Layer w0.164: v1(33.071,80.95) 33.375,81.254 46.599,81.254 47.803,80.05 U3.4 v1(62.292,80.05) ; Display.2 33.08,69.088 33.755,68.413 41.498,68.413 45.136,64.775 ; R1.2 40.929,64.075 41.224,63.779 43.785,63.779 44.78,64.775 45.136,64.775 ; v1(43.688,39.599) 45.009,38.278 59.716,38.278 60.601,39.162 60.601,52.339 63.665,55.403 63.665,57.057 63.4,57.322 C10.2 63.4,67.105 v1(62.509,67.996) ; R16.2 45.136,64.775
CS: 2.7 Display.7 | length 61.8
  Top Layer w0.164: Display.7 45.999,72.492 46.939,73.431 54.407,73.431 60.706,67.132 60.706,57.836 61.951,56.591 61.951,49.911 64.059,47.803 64.059,41.097 62.999,40.037 50.906,40.037 50.557,40.386 2.7
D+: J1.B6 U1.16 | length 19.6
  Top Layer w0.164: v1(49.809,38.938) 50.724,38.024 50.724,34.9 v1(52.654,32.969)
  Bottom Layer w0.164: v1(49.809,38.938) 49.809,39.752 49.962,39.904 54.864,39.904 56.275,41.315 U1.16 ; v1(52.654,32.969) 53.098,32.525 J1.B6
D-: J1.B7 U1.22@56.925,43.325 | length 12.9
  Top Layer w0.164: v1(53.543,33.482) 53.543,37.16 v1(55.778,39.395)
  Bottom Layer w0.164: v1(53.543,33.482) 54,33.025 J1.B7 ; v1(55.778,39.395) 56.925,40.542 U1.22@56.925,43.325
DC: 2.8 Display.6 | length 49
  Top Layer w0.164: v1(34.976,69.063) 34.976,64.032 35.889,63.118 35.889,55.391 39.686,51.595 43.313,51.595 44.419,50.489 44.419,45.942 46.547,43.815 50.8,43.815 51.827,42.788 2.8
  Bottom Layer w0.164: v1(34.976,69.063) 42.707,69.063 43.24,69.596 Display.6
Dir1: ?.1@49.3,19.8 U2.1 | length 62.1
  Top Layer w0.164: v1(30.759,65.595) 30.759,58.486 33.783,55.462 33.783,54.989 34.105,54.668 34.105,53.526 37.831,49.799 39.634,49.799 40.513,48.92 40.513,26.01 40.615,25.908 43.192,25.908 ?.1@49.3,19.8
  Bottom Layer w0.164: U2.1 28.941,65.813 29.159,65.595 v1(30.759,65.595)
Dir2: ?.1@42.6,30.9 U2.9 | length 49.5
  Top Layer w0.164: v1(34.468,62.255) 35.381,61.342 35.381,55.119 39.345,51.156 41.224,51.156 42.088,50.292 42.088,37.465 42.6,36.953 ?.1@42.6,30.9
  Bottom Layer w0.164: U2.9 23.307,57.985 29.486,57.985 33.757,62.255 v1(34.468,62.255)
Dir3: J?.1@62.9,24.8 U2.11 | length 77.9
  Top Layer w0.164: v1(21.311,56.439) 21.211,56.339 21.211,54.356 21.668,53.899 v1(25.451,53.899) ; v1(36.307,50.165) 37.091,49.381 39.327,49.381 40.03,48.677 40.03,24.74 45.974,18.796 56.896,18.796 J?.1@62.9,24.8
  Bottom Layer w0.164: v1(21.311,56.439) 21.707,56.836 U2.11 ; v1(25.451,53.899) 26.518,53.899 28.448,51.968 33.298,51.968 33.959,51.308 33.959,50.546 34.34,50.165 v1(36.307,50.165)
Dir4: ?.1@12.4,57.4 U2.13 | length 27
  Top Layer w0.164: ?.1@12.4,57.4 15.147,60.147 15.147,61.891 14.577,62.461 14.577,68.349 15.24,69.012 17.704,69.012 18.301,68.415 18.301,62.557 v1(20.101,60.757)
  Bottom Layer w0.164: U2.13 v1(20.101,60.757)
Dir5: J?.1@12.4,80.7 U2.24 | length 55.9
  Top Layer w0.164: J?.1@12.4,80.7 11.578,80.7 10.541,79.663 10.541,49.733 11.176,49.098 15.545,49.098 17.247,50.8 v1(17.247,65.813)
  Bottom Layer w0.164: U2.24 v1(17.247,65.813)
Dir6: ?.1@12.4,69.1 U2.26 | length 19.5
  Top Layer w0.164: v1(20.269,65.888) 22.479,68.097 v1(22.479,70.155)
  Bottom Layer w0.164: ?.1@12.4,69.1 14.572,71.272 21.361,71.272 v1(22.479,70.155) ; U2.26 18.501,66.319 18.933,65.888 v1(20.269,65.888)
DTR: 2.1 2.15 2.38 2.39 3v3V.2 "5V Power.2" *.2 ?.3 C1.2 C2.1 C3.1 C4.2 C5.2 C6.1 C7.2 C9.1 C10.1 C11.2 Display.1 J1.B1 J2.1 J?.3 M1.2 M2.2 M3.2 M4.2 R4.2 R5.1 R7.1 R9.1 RXD.2 TXD.2 U1.2 U1.7 U1.18 U1.21 U1.26 U2.3 U2.5 U2.29 U3.1 | length 483.5
  Top Layer w0.164: v1(17.424,73.939) 19.406,73.939 ; v1(18.364,74.981) 19.406,73.939 ; v1(20.472,64.033) 19.633,64.873 19.633,65.532 ; C5.2 C5.2@20.5,73.939 ; v1(20.907,65.243) 19.922,65.243 19.633,65.532 ; C3.1 25.175,64.995 ; v1(26.01,63.246) 25.175,64.081 25.175,64.995 ; v1(26.01,64.16) 25.175,64.995 ; *.2 v1(29.382,74.553) 29.382,73.939 ; Display.1 30.54,72.863 29.464,73.939 29.382,73.939 ; v1(32.588,63.398) 32.9,63.087 ; v1(32.9,59.182) 32.9,63.087 ; v1(32.9,64.262) 32.9,63.087 ; v1(33.122,59.182) 33.122,62.865 32.9,63.087 ; J2.1 39.362,76.098 45.275,76.098 ; ?.3@42.6,26.9 43.908,26.9 ; v1(42.926,60.528) 41.072,58.674 41.072,58.42 ; 2.1 42.937,38.513 ; 2.38 v1(42.937,60.517) v1(42.937,60.528) ; v1(44.247,53.543) 41.072,56.718 41.072,58.42 ; C1.2 45.275,75.196 ; C2.1 46.475,77.216 45.357,76.098 45.275,76.098 ; v1(49.403,64.008) 50.673,65.278 v1(51.35,65.278) ; v1(53.01,45.761) 53.01,46.736 54.026,47.752 ; ?.3@53.3,19.8 51.75,21.35 51.75,23.383 ; v1(53.391,48.158) 53.34,48.108 50.43,48.108 2.39 50.43,53.862 49.251,55.042 44.755,55.042 42.926,56.871 42.926,58.344 42.596,58.674 41.326,58.674 41.072,58.42 ; v1(53.569,48.209) 54.026,47.752 ; v1(53.696,48.336) 54.61,48.336 ; v1(55.118,74.27) v1@55.194,74.27 ; v1(56.312,56.947) 57.417,55.842 57.417,47.244 ; v1(58.217,39.218) 58.217,38.333 ; v1(58.979,43.104) 58.979,43.967 59.296,44.285 2.15 61.849,44.285 61.884,44.25 3v3V.2 62.129,43.078 v1(58.979,43.078) v1(58.953,43.078) 58.026,43.078 ; v1(60.782,68.682) 59,70.464 ; J?.3@62.9,28.8 59.7,32 RXD.2 58.217,38.333 ; 19.406,73.939 C5.2@20.5,73.939 ; 19.406,73.939 19.633,73.712 v1(19.633,70.104) 19.633,65.532 ; C5.2@20.5,73.939 29.382,73.939 ; 42.937,38.513 42.937,37.987 44.6,36.324 ; 42.937,38.513 TXD.2 44.6,36.324 ; 43.908,26.9 48.233,26.9 ; 43.908,26.9 44.6,27.592 44.6,36.324 ; 44.6,36.324 44.602,36.322 44.602,30.531 48.233,26.9 ; 45.275,75.196 45.275,76.098 ; 45.275,75.196 46.736,76.657 52.807,76.657 v1@55.194,74.27 ; 48.233,26.9 51.75,23.383 ; 48.233,26.9 48.55,26.9 51.75,23.7 51.75,23.383 ; 51.75,23.383 52.273,22.86 53.848,22.86 58.217,27.229 58.217,38.333 ; 54.026,47.752 56.845,47.752 ; 54.026,47.752 54.61,48.336 ; 54.61,48.336 56.261,48.336 56.845,47.752 ; v1@55.194,74.27 59,74.27 C4.2 59,70.464 ; v1@55.194,74.27 59,70.464 ; 56.845,47.752 57.417,47.181 ; 56.845,47.752 56.909,47.752 57.417,47.244 ; 57.417,43.688 57.417,47.181 ; 57.417,43.688 57.417,43.183 57.522,43.078 58.026,43.078 ; 57.417,43.688 58.026,43.078 ; 57.417,47.181 57.417,47.244
  Bottom Layer w0.164: ?.3@12.4,53.4 13.411,54.411 13.411,58.386 12.192,59.605 12.192,60.316 13.411,61.536 13.411,64.089 12.4,65.1 13.437,66.137 13.437,69.088 14.453,70.104 v1(19.633,70.104) ; J?.3@12.4,76.7 14.664,76.7 ; v1(17.424,73.939) 14.664,76.7 ; v1(18.364,74.981) 18.364,75.997 24.417,82.05 ; v1(20.472,64.033) v1@25.771,64.033 ; v1(20.907,65.243) 20.907,65.707 ; U2.29 20.907,65.707 ; U2.5 25.781,62.594 ; U2.3 v1@25.771,64.213 ; v1(26.01,63.246) 25.781,63.475 ; v1(26.01,64.16) v1@25.781,64.16 ; C7.2 24.417,82.05 ; C9.1 28.1,61.976 ; v1(29.382,74.553) 29.729,74.9 R5.1 35.675,77.038 35.96,77.323 J2.1 ; v1(32.588,63.398) 29.464,63.398 28.1,62.034 28.1,61.976 ; C11.2 v1@32.9,58.96 ; v1(32.9,59.182) v1@32.9,58.96 ; v1(32.9,64.262) 34.602,64.262 34.83,64.033 ; v1(33.122,59.182) v1@32.9,58.96 ; C6.1 44.12,51.2 v1(44.247,53.543) ; v1(42.937,60.517) v1(42.926,60.528) ; U1.2 49.125,51.434 ; M1.2 50.038,53.312 50.038,51.791 49.125,51.791 ; v1(49.403,64.008) 49.403,67.192 53.28,71.069 U3.1 53.28,74.27 v1(55.118,74.27) ; U1.26 49.775,44.416 53.025,47.666 ; v1(51.35,65.278) 51.35,65.664 ; R7.1 51.35,65.664 ; M2.2 52.247,54.05 52.553,54.356 52.553,57.898 ; U1.7 52.375,49.174 53.025,48.524 ; v1(53.01,45.761) v1@53.025,45.745 ; ?.3@53.3,19.8 54.153,19.8 54.153,21.336 55.575,22.758 55.575,25.832 54.839,26.568 54.839,30.025 J1.B1 61.675,30.025 J?.3@62.9,28.8 ; v1(53.391,48.158) 53.025,48.524 ; R9.1 52.814,64.2 ; v1(53.696,48.336) v1(53.569,48.209) 53.025,47.666 ; U1.18 54.975,44.679 58.573,44.679 58.979,44.273 v1(58.979,43.104) ; v1(56.312,56.947) 56.159,57.099 56.159,58.928 56.481,59.25 R4.2 57.125,59.25 57.125,62.992 56.388,63.729 53.286,63.729 52.814,64.2 ; v1(58.217,39.218) 58.217,42.342 v1(58.953,43.078) v1(58.979,43.104) ; v1(58.979,43.078) v1(58.979,43.104) ; v1(60.782,68.682) 61.876,67.588 C10.1 ; 14.664,76.7 16.469,76.7 21.819,82.05 24.417,82.05 ; 20.907,65.707 22.454,64.16 v1@25.771,64.16 ; v1@25.771,64.033 v1@25.771,64.16 ; v1@25.771,64.033 v1@25.781,64.033 ; v1@25.771,64.033 25.771,63.485 25.781,63.475 ; v1@25.771,64.16 v1@25.771,64.213 ; v1@25.771,64.16 v1@25.781,64.16 ; v1@25.771,64.213 25.781,64.213 v1@25.781,64.16 ; 25.781,62.594 25.781,63.475 ; 25.781,62.594 27.482,62.594 28.1,61.976 ; 25.781,63.475 v1@25.781,64.033 ; v1@25.781,64.033 v1@25.781,64.16 ; v1@25.781,64.033 32.9,64.033 34.83,64.033 ; 34.83,64.033 36.964,61.9 38.448,61.9 39.444,60.904 42.55,60.904 v1(42.926,60.528) ; v1(42.926,60.528) v1(42.937,60.528) 47.372,60.528 ; v1(44.247,53.543) 45.999,51.791 48.768,51.791 ; v1(44.247,53.543) 47.015,53.543 48.768,51.791 ; 47.372,60.528 49.936,60.528 51.802,58.652 52.553,57.898 ; 47.372,60.528 M3.2 50.521,58.6 50.571,58.65 M4.2 52.553,57.898 ; 48.768,51.791 49.125,51.434 ; 48.768,51.791 49.125,51.791 ; 49.125,51.434 49.125,51.791 ; 51.35,65.664 52.814,64.2 ; v1@53.025,45.745 53.025,45.761 53.025,47.666 ; v1@53.025,45.745 U1.21 v1@53.025,45.745 ; 53.025,47.666 53.025,48.158 53.025,48.524
EOT-Pin: U2.27
MISO: R6.1 U2.16 | length 5.2
  Bottom Layer w0.164: R6.1 17.1,58.344 17.688,58.344 U2.16
MISO_PIN: 2.31 R5.2 R6.2 | length 78.2
  Top Layer w0.164: v1(21.869,54.839) 23.546,56.515 23.546,62.577 23.361,62.761 23.361,70.67 v1(22.987,71.044) ; 2.31 51.827,59.728 50.494,61.061 50.494,62.127 v1(53.442,65.075)
  Bottom Layer w0.164: R6.2 17.409,53.325 17.678,53.594 17.678,53.924 18.288,54.534 21.565,54.534 v1(21.869,54.839) ; v1(22.987,71.044) 25.543,73.6 R5.2 36.424,73.6 39.035,76.212 55.284,76.212 56.19,75.306 56.19,67.823 v1(53.442,65.075)
MOSI: R3.1 U2.15 | length 3
  Bottom Layer w0.164: R3.1 17.9,57.311 18.501,57.912 U2.15
MOSI_PIN: 2.37 R3.2 R4.1 | length 64.4
  Top Layer w0.164: v1(44.704,56.82) 44.207,57.317 2.37 44.207,63.21 43.688,63.729 42.062,63.729 41.275,64.516 41.275,65.532 41.885,66.142 50.28,66.142 50.592,66.454 52.791,66.454 53.103,66.142 v1(57.201,66.142)
  Bottom Layer w0.164: R3.2 20.942,55.225 21.211,55.494 22.677,55.494 23.297,56.114 31.286,56.114 31.446,56.274 36.906,56.274 37.884,57.252 42.367,57.252 42.799,56.82 v1(44.704,56.82) ; R4.1 56.9,58.268 57.404,58.268 57.709,58.572 57.709,65.634 v1(57.201,66.142)
"Net3v3V Power_1": 3v3V.1 R16.1 | length 45.5
  Top Layer w0.164: v1(45.9,67.031) v1(56.515,67.031) ; 3v3V.1 v1(63.3,47.254)
  Bottom Layer w0.164: R16.1 v1(45.9,67.031) ; v1(56.515,67.031) 58.802,69.318 62.483,69.318 65.203,66.598 65.203,54.356 64.878,54.031 64.179,54.031 61.964,51.816 61.964,48.59 v1(63.3,47.254)
"Net5V Power_1": "5V Power.1" R15.1 | length 21.6
  Top Layer w0.164: v1(48.717,39.975) 48.717,27.864 49.276,27.305 49.645,27.305 53.25,23.7
  Bottom Layer w0.164: R15.1 v1(48.717,39.975)
NetC11_1: 2.3 C11.1 R1.1 | length 28
  Top Layer w0.164: v1(41.732,57.912) 41.732,57.455 46.203,52.984 v1(46.203,48.92) ; v1(43.612,47.346) 43.612,45.255 45.477,43.389 2.3
  Bottom Layer w0.164: C11.1 36.725,58.925 R1.1 41.402,58.925 41.732,58.595 v1(41.732,57.912) ; v1(43.612,47.346) 44.628,47.346 v1(46.203,48.92)
NetM1_1: M1.1 R13.1 | length 73.8
  Top Layer w0.164: v1(24.053,73.257) 24.262,73.048 24.262,64.534 24.382,64.413 24.382,56.822 28.448,52.756 28.448,49.471 28.956,48.963 32.631,48.963 v1(34.595,50.927)
  Bottom Layer w0.164: R13.1 19.208,80.6 21.565,82.956 28.524,82.956 28.524,77.728 v1(24.053,73.257) ; v1(34.595,50.927) 36.041,50.927 39.318,54.205 47.646,54.205 M1.1
NetM2_1: M2.1 R11.1 | length 41.9
  Bottom Layer w0.164: R11.1 41.95,73.889 42.672,73.889 43.142,74.359 43.142,75.041 43.895,75.794 55.067,75.794 55.772,75.089 55.772,72.964 50.698,67.89 50.698,63.398 52.984,61.112 52.984,53.734 M2.1
NetM3_1: M3.1 R12.1 | length 8.6
  Bottom Layer w0.164: R12.1 44.383,56.2 44.755,55.828 48.028,55.828 M3.1
NetM4_1: M4.1 R14.1 | length 8.1
  Bottom Layer w0.164: R14.1 46.664,59.025 47.828,57.861 51.089,57.861 M4.1
NetR2_1: R2.1 TXD.1 | length 14.5
  Top Layer w0.164: TXD.1 45.212,38.35 45.796,37.766 v1(45.796,37.16)
  Bottom Layer w0.164: R2.1 44.321,44.775 42.215,42.669 42.215,38.608 43.663,37.16 v1(45.796,37.16)
NetR17_1: R17.1 RXD.1 | length 22.4
  Top Layer w0.164: v1(59.08,39.116) 59.08,38.97 RXD.1
  Bottom Layer w0.164: v1(59.08,39.116) 60.091,40.127 60.091,52.421 63.247,55.576 63.247,56.677 62.699,57.225 R17.1
"NetRXD ATMEGA_1": "RXD ATMEGA.1" U2.30 | length 27.3
  Top Layer w0.164: v1(29.82,66.446) 29.82,51.994 30.953,50.86 32.1,50.86
  Bottom Layer w0.164: U2.30 21.939,65.455 22.884,65.455 23.876,66.446 v1(29.82,66.446)
"NetRXD ESP32_2": 2.34 "RXD ESP32.2" | length 14.8
  Top Layer w0.164: 2.34 48.017,64.516 49.212,65.711 50.698,65.711 51.023,66.035 51.97,66.035 52.295,65.711 53.907,65.711 54.618,65 55.7,65
"NetTXD ATMEGA_1": "TXD ATMEGA.1" U2.31 | length 34.7
  Top Layer w0.164: 19.3,50.86 23.742,50.86 26.432,53.55 26.432,54.08 23.964,56.548 23.964,63.995 23.844,64.116 23.844,71.31 23.219,71.934 22.072,71.934 21.616,71.479 21.616,68.784 v1(21.514,68.682)
  Bottom Layer w0.164: v1(21.514,68.682) 21.92,68.275 22.507,68.275 U2.31
"NetTXD ESP32_2": 2.35 "TXD ESP32.2" | length 9.9
  Top Layer w0.164: 42.7,65 45.72,65 46.747,63.973 2.35
OscIN: C6.2 U1.27 U2.7 X1.1 | length 52.3
  Top Layer w0.164: X1.1 v1(37.5,61.26) 37.5,54.963 39.617,52.846 v1(43.277,52.846) 43.469,52.654 44.298,52.654 45.567,51.385 45.567,48.337 47.93,45.974 v1(49.125,45.974)
  Bottom Layer w0.164: U2.7 24.113,60.994 23.825,60.706 23.825,59.766 24.917,58.674 29.149,58.674 33.48,63.006 34.978,63.006 36.724,61.26 v1(37.5,61.26) ; C6.2 43.081,52.65 v1(43.277,52.846) ; U1.27 v1(49.125,45.974)
OscOUT: C3.2 U1.28 U2.8 X1.2 | length 67.8
  Top Layer w0.164: C3.2 25.908,70.6 28.36,68.148 ; v1(27.885,60.194) 27.885,66.163 29.115,67.393 ; v1(29.159,49.784) 29.159,67.349 29.115,67.393 ; X1.2 31.172,68.148 29.87,68.148 ; v1(47.269,45.695) 47.65,45.314 49.759,45.314 v1(49.809,45.364) ; 28.36,68.148 29.87,68.148 ; 28.36,68.148 29.115,67.393 ; 29.115,67.393 29.87,68.148
  Bottom Layer w0.164: U2.8 v1(27.885,60.194) ; v1(29.159,49.784) 29.845,49.098 40.183,49.098 42.596,46.685 44.475,46.685 44.552,46.761 46.203,46.761 v1(47.269,45.695) ; U1.28 48.475,46.341 48.768,46.634 49.53,46.634 49.809,46.355 v1(49.809,45.364)
RES: 2.9 Display.5 | length 59
  Top Layer w0.164: v1(46.68,75.133) 53.34,75.133 61.214,67.259 61.214,64.422 61.954,63.682 61.954,58.302 62.611,57.645 v1(62.611,56.268) ; 2.9 53.097,43.952 v1(54.712,45.567)
  Bottom Layer w0.164: Display.5 40.7,72.619 42.57,72.619 43.702,73.75 43.702,74.422 44.185,74.906 46.452,74.906 v1(46.68,75.133) ; v1(54.712,45.567) 57.912,45.567 59.673,47.328 59.673,52.822 62.611,55.76 v1(62.611,56.268)
RXD: "RXD ATMEGA.2" "RXD ESP32.1" R17.2 U1.5 | length 67.6
  Bottom Layer w0.164: 32.1,53.4 37.893,53.4 39.116,54.623 43.561,54.623 43.726,54.788 50.343,54.788 50.775,54.356 50.775,52.273 51.308,51.74 ; U1.5 51.075,51.74 51.308,51.74 ; 55.7,62.46 55.651,62.46 55.651,56.642 ; R17.2 60.89,55.975 60.477,56.388 60.477,59.934 61.028,60.485 61.028,63.103 59.944,64.187 58.42,64.187 58.14,63.906 58.14,57.835 ; 51.308,51.74 52.4,51.74 ; 52.4,51.74 55.651,55.192 ; 52.4,51.74 54.585,51.74 55.651,52.807 55.651,55.192 ; 55.651,55.192 55.651,56.642 ; 55.651,55.192 58.14,57.835 ; 55.651,56.642 56.007,56.286 56.591,56.286 58.14,57.835
SCK: R8.1 U2.17 | length 3.7
  Bottom Layer w0.164: R8.1 13.125,59.925 13.437,59.614 14.567,59.614 15.147,60.194 U2.17
SCK_PIN: 2.30 R7.2 R8.2 | length 59.1
  Top Layer w0.164: v1(51.13,61.697) 53.097,59.73 2.30
  Bottom Layer w0.164: R8.2 13.867,60.2 13.867,68.554 14.782,69.468 23.901,69.468 25.629,67.741 26.592,67.741 26.924,68.073 31.012,68.073 31.521,67.564 31.521,66.04 31.953,65.608 34.214,65.608 37.313,62.509 40.056,62.509 41.224,61.341 48.768,61.341 50.05,62.623 ; R7.2 50.05,62.623 ; v1(51.13,61.697) 50.976,61.697 50.05,62.623
SCL: 2.11 Display.3 | length 50.8
  Top Layer w0.164: Display.3 35.62,67.793 36.398,67.014 36.398,55.474 39.854,52.018 43.731,52.018 45.149,50.601 45.149,46.876 47.372,44.652 53.103,44.652 54.076,45.624 54.076,46.913 56.744,47.118 56.999,45.974 55.637,44.612 2.11
SDA: 2.10 Display.4 | length 51.3
  Top Layer w0.164: Display.4 38.16,69.088 39.328,67.92 57.379,67.92 58.776,66.523 v1(58.776,63.551) ; 2.10 54.367,44.182 55.855,45.669 v1(55.855,46.33)
  Bottom Layer w0.164: v1(55.855,46.33) 59.233,49.708 59.233,55.042 59.792,55.601 59.792,62.535 v1(58.776,63.551)
SS: R10.1 U2.14 | length 12.1
  Bottom Layer w0.164: R10.1 17.2,52.045 16.535,52.709 16.535,59.106 17.12,59.69 19.034,59.69 19.288,59.436 U2.14
SS_PIN: 2.29 R9.2 R10.2 | length 48
  Top Layer w0.164: v1(50.419,55.88) 53.351,55.88 54.367,56.896 2.29 54.367,60.898 v1(52.603,62.662)
  Bottom Layer w0.164: R10.2 17.2,50.038 17.479,49.759 20.297,49.759 25.146,54.607 29.667,54.607 29.741,54.533 37.975,54.533 38.482,55.041 40.756,55.041 41.008,55.293 49.832,55.293 v1(50.419,55.88) ; v1(52.603,62.662) 52.842,62.9 R9.2
Step1: ?.2@51.3,19.8 R13.2 U2.32 | length 91.5
  Top Layer w0.164: v1(15.697,77.687) 15.697,71.78 18.719,68.759 18.719,63.603 19.304,63.017 21.336,63.017 22.504,64.186 v1(22.504,66.091) ; v1(30.531,67.437) 31.42,66.548 31.42,59.631 34.201,56.849 34.201,55.392 34.523,55.071 34.523,54.126 38.348,50.3 39.908,50.3 40.933,49.275 40.933,28.688 41.732,27.889 v1(43.815,27.889)
  Bottom Layer w0.164: v1(15.697,77.687) 16.75,78.74 R13.2 ; v1(22.504,66.091) 22.898,66.091 23.307,66.5 U2.32 23.307,67.437 25.235,67.437 25.349,67.323 27.343,67.323 27.457,67.437 v1(30.531,67.437) ; v1(43.815,27.889) 51.3,20.404 ?.2@51.3,19.8
Step2: ?.2@42.6,28.9 R11.2 U2.2 | length 79.1
  Top Layer w0.164: v1(26.289,65) v1(26.289,68.377) ; v1(32.487,68.834) 33.832,67.489 33.832,61.619 34.619,60.832 34.619,55.81 34.941,55.489 34.941,54.496 38.713,50.724 40.666,50.724 41.605,49.784 41.605,29.895 ?.2@42.6,28.9
  Bottom Layer w0.164: U2.2 v1(26.289,65) ; v1(26.289,68.377) 26.289,71.78 26.645,72.136 ; v1(32.487,68.834) 27.407,68.834 26.645,69.596 26.645,72.136 ; R11.2 38.532,74.575 36.804,72.847 27.356,72.847 26.645,72.136
Step3: J?.2@62.9,26.8 R12.2 U2.10 | length 95.6